# Altium PCB PCB1.PcbDoc
Units mil, origin at the board's own origin, x right, y up, seen from the top; angles counter-clockwise.
Board outline 4530 x 1050 mil, 2 copper layers (Top Layer, Bottom Layer); 38 components, 23 nets, 97 pads, 0 vias.
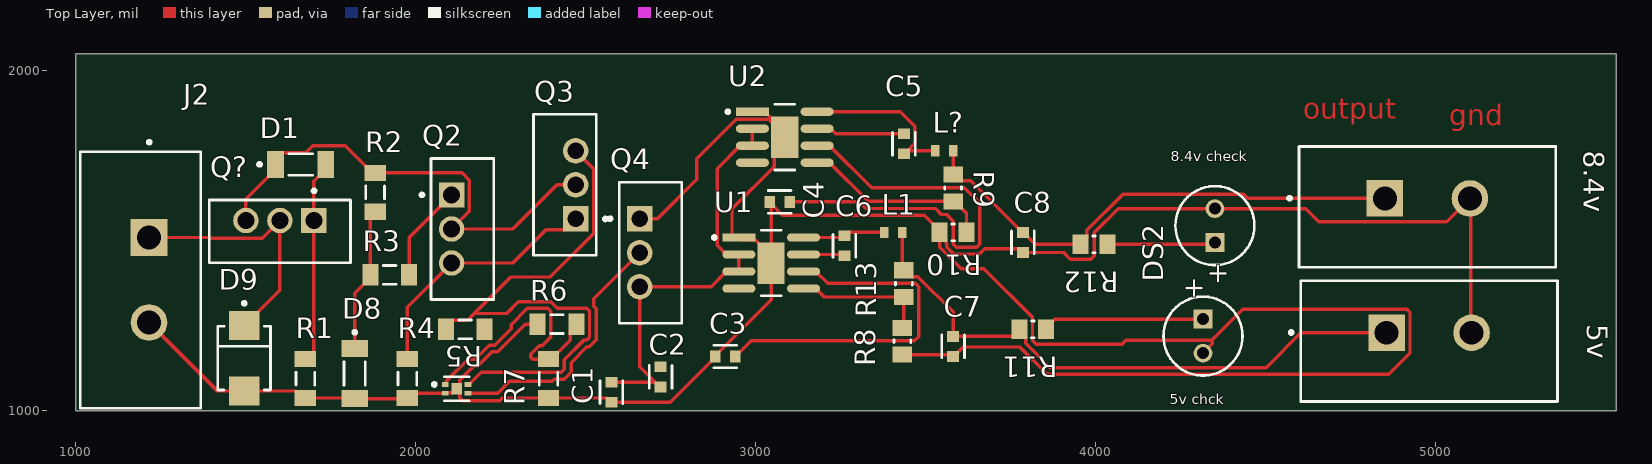
[diagram p0: Top Layer view]
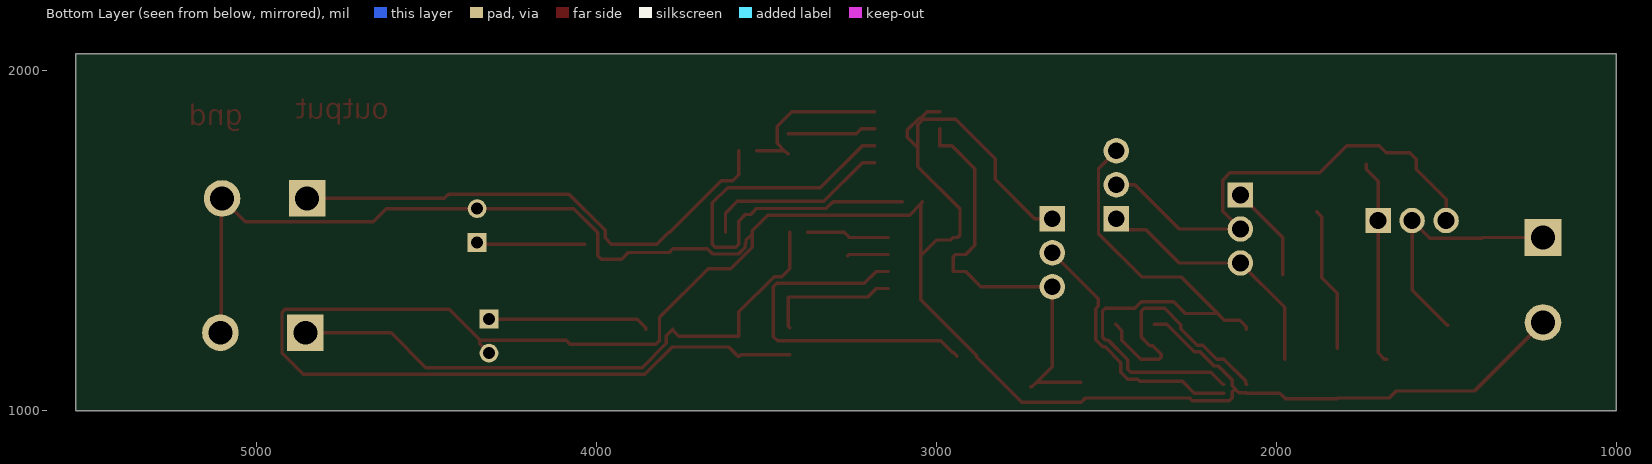
[diagram p1: Bottom Layer view, seen from below]
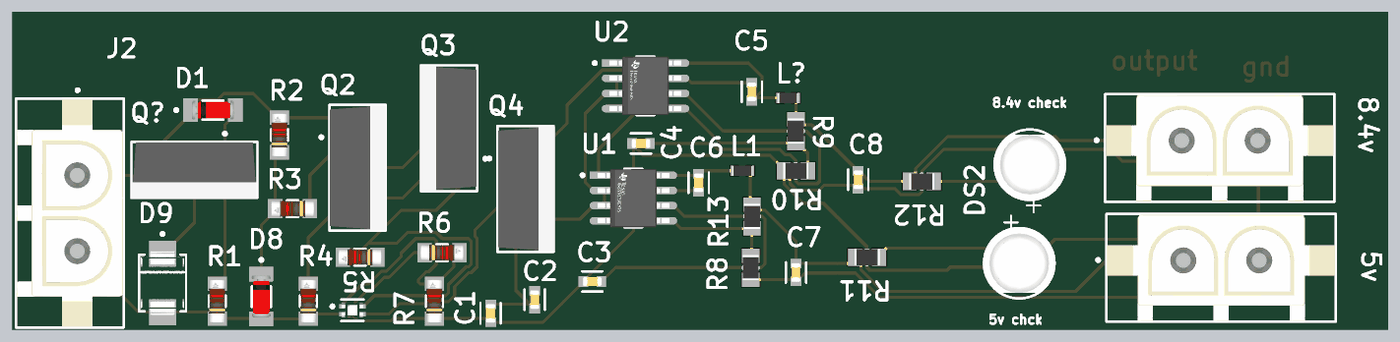
[diagram p2: 3D render of the assembled board from above, using the file's embedded part models]

## Layer stack, top to bottom
Top Solder: solder mask 0.4, Solder Resist, Dk 3.5
Top Layer: signal copper 1.4
Dielectric 1: dielectric 12.6, FR-4, Dk 4.8
Bottom Layer: signal copper 1.4
Bottom Solder: solder mask 0.4, Solder Resist, Dk 3.5

## Board outline
1000,1000 5530,1000 5530,2050 1000,2050

## Design rules (kind name [scope] priority, off if disabled: settings)
Clearance [All] p1: gap=10 ignorepadtopadclearanceinfootprint=FALSE
PolygonConnect [All] p1: connectstyle=Relief reliefconductorwidth=10 reliefentries=4 polygonreliefangle="90 Angle" airgapwidth=10
RoutingVias [All] p1: holewidth=28 width=50 viastyle="Through Hole" minholewidth=28 minwidth=50 maxholewidth=28 maxwidth=50
SolderMaskExpansion [All] p1: expansion=4 istentingtop=FALSE
SupplyNets "Schematic Supply Nets_3" [InNet('GND')] p1: voltage=0.000
SupplyNets "Schematic Supply Nets_2" [InNet('+12')] p2: voltage=0.000
SupplyNets "Schematic Supply Nets_1" [InNet('+8.4')] p3: voltage=0.000
SupplyNets "Schematic Supply Nets" [InNet('+5')] p4: voltage=0.000
Width [All] p1: maxlimit=10 minlimit=10 preferedwidth=10
30 further rules are at their usual default settings.

## Classes and differential pairs
component class Sheet1: 1 "12v inp" C1 C2 C3 C4 C5 C6 C7 C8 D1 D8 D9 DS2 J2 L1 L? Q2 Q3 Q4 Q? R1 R2 R3 R4 R5 R6 R7 R8 R9 R10 R11 R12 R13 U1 U2

## Components (designator, comment, footprint, x,y, rotation, side; value= is the part's Value field where it differs from the comment)
5v "350428-1" FP-350428-1-MFG 4980,1205 r0 top (schematic designator J1)
"5v chck" "WP7113SGC" KING-WP7113SGC_V 4315,1220 r270 top (schematic designator DS?)
8.4v "350428-1" FP-350428-1-MFG 4975,1600 r0 top (schematic designator J3)
C1 "CC0603KRX7R9BB103" FP-CC0603-DA-MFG 2575,1055 r270 top value="10 nF"
C2 "CC0603KRX7R9BB103" FP-CC0603-DA-MFG 2720,1100 r90 top value=0.1µF
C3 "CC0603KRX7R9BB103" FP-CC0603-DA-MFG 2910,1160 r0 top value=0.1µF
C4 "CC0603KRX7R9BB103" FP-CC0603-DA-MFG 3070,1615 r0 top value=1µF
C5 "CC0603KRX7R9BB103" FP-CC0603-DA-MFG 3435,1785.47 r270 top value=0.1µF
C6 "CC0603KRX7R9BB103" FP-CC0603-DA-MFG 3260,1485.47 r90 top value=0.1µF
C7 "CC0603KRX7R9BB103" FP-CC0603-DA-MFG 3580,1189.53 r270 top value=1.5µF
C8 "CC0603KRX7R9BB103" FP-CC0603-DA-MFG 3785,1495.47 r270 top value=0.39µF
D1 "TZMC10GS08" FP-6_560-5005_01-4-MFG 1661.18,1725 r0 top
D8 "TZMC10GS08" FP-6_560-5005_01-4-MFG 1820,1110 r270 top
D9 "SMBJ28A" FP-SMBJ-MFG 1495,1155 r270 top
DS2 "WP7113SGC" KING-WP7113SGC_V 4350,1545 r90 top
J2 "350428-1" FP-350428-1-MFG 1190,1385 r270 top
L1 "B82496C3330J" INDC1608X90X30LL10T20 3404.02,1525 r0 top
L? "B82496C3330J" INDC1608X90X30LL10T20 3554.02,1765 r0 top
Q2 "IRF5305PBF" FP-PG-TO220-3-0 2136.89,1535 r0 top
Q3 "IRF5305PBF" FP-PG-TO220-3-0 2438.11,1665 r180 top
Q4 "IRF5305PBF" FP-PG-TO220-3-0 2690,1465 r0 top
Q? "IRF5305PBF" FP-PG-TO220-3-0 1600,1528.11 r270 top
R1 "CMA02040X1000GB300" FP-CMA0204-MFG 1675,1095 r90 top
R2 "CMA02040X1000GB300" FP-CMA0204-MFG 1880,1642.91 r90 top
R3 "CMA02040X1000GB300" FP-CMA0204-MFG 1922.91,1400 r180 top
R4 "CMA02040X1000GB300" FP-CMA0204-MFG 1975,1095 r90 top
R5 "CMA02040X1000GB300" FP-CMA0204-MFG 2145,1240 r180 top
R6 "CMA02040X1000GB300" FP-CMA0204-MFG 2415,1255 r0 top
R7 "CMA02040X1000GB300" FP-CMA0204-MFG 2390,1095 r90 top
R8 "RC0805JR-070RL" RESC2013X60X35ML10T20 3430.98,1205 r90 top
R9 "RC0805JR-070RL" RESC2013X60X35ML10T20 3580,1655.63 r90 top
R10 "RC0805JR-070RL" RESC2013X60X35ML10T20 3580,1525 r0 top
R11 "RC0805JR-070RL" RESC2013X60X35ML10T20 3814.37,1240 r180 top
R12 "RC0805JR-070RL" RESC2013X60X35ML10T20 3994.37,1490 r180 top
R13 "RC0805JR-070RL" RESC2013X60X35ML10T20 3435,1374.37 r90 top (schematic designator R7)
U1 "LMR36510ADDAR" FP-DDA0008E-IPC_A 3044.88,1435 r0 top
U2 "LMR36510ADDAR" FP-DDA0008E-IPC_A 3084.88,1805 r0 top
? "ZXCT1023DFGTA" FP-TDFN1218-4-MFG 2120,1065 r0 top

## Footprints (in the part's own frame and the unit in brackets; to place one, negate y for a bottom-side part, rotate by r counter-clockwise, add the part's x,y. Pads: shape width x height; smd on the part's side, far side on the other; paste and mask are expansions set on the pad)
FP-6_560-5005_01-4-MFG [mm]
  rect 1.25x2 smd paste+0 mask+0: 1(-1.875,0) 2(1.875,0)
  silkscreen extent -3.2,-0.8 0.87,0.8, body extent -2.6,-1.1 2.6,1.1, height 0.25
FP-350428-1-MFG [mm]
  rect 2.73x2.73 hole 1.78 paste-2539.97 mask+0: 1(-3.175,0.635)
  round 2.73 hole 1.78 paste-2539.97 mask+0: 2(3.175,0.635)
  silkscreen extent -10.42,-4.51 9.59,4.51, body extent -9.69,-4.61 9.69,4.61, height 0.25
FP-CC0603-DA-MFG [mm]
  rect 0.8x0.9 smd paste+0 mask+0: 1(-0.75,0) 2(0.75,0)
  silkscreen extent -0.85,-0.85 0.85,0.85, body extent -1.35,-0.75 1.35,0.75, height 0.25
FP-CMA0204-MFG [mm]
  rect 1.2x1.6 smd paste+0 mask+0: 1(-1.45,0) 2(1.45,0)
  silkscreen extent -0.48,-0.7 0.48,0.7, body extent -2.15,-0.9 2.15,0.9, height 0.25
FP-DDA0008E-IPC_A [mm]
  rect 2.474x0.622 smd paste+0 mask+0: 1(-2.416,1.905)
  rrect100% 2.474x0.622 smd paste+0 mask+0: 2(-2.416,0.635) 3(-2.416,-0.635) 4(-2.416,-1.905) 5(2.416,-1.905) 6(2.416,-0.635) 7(2.416,0.635) 8(2.416,1.905)
  rect 2.025x3.1 smd paste-1000 mask+0: 9(0,0)
  silkscreen extent -4.37,-2.45 0.75,2.45, body extent -4.15,-2.95 4.15,2.95, height 0.25
FP-PG-TO220-3-0 [mm]
  rect 1.9x1.9 hole 1.25 paste-2539.97 mask+0: 1(-0.81,2.54)
  round 1.9 hole 1.25 paste-2539.97 mask+0: 2(-0.81,0) 3(-0.81,-2.54)
  silkscreen extent -3.15,-5.27 2.34,5.27, body extent -2.44,-5.37 2.44,5.37, height 0.25
FP-SMBJ-MFG [mm]
  rect 2.16x2.26 smd paste+0 mask+0: 1(-2.45,0) 2(2.45,0)
  silkscreen extent -4.22,-1.97 2.37,1.97, body extent -3.63,-2.07 3.63,2.07, height 0.25
FP-TDFN1218-4-MFG [mm]
  rect 0.5x0.35 smd paste+0 mask+0: 1(-0.85,0.325) 2(-0.85,-0.325) 3(0.85,-0.325) 4(0.85,0.325)
  rect 0.8x0.85 smd paste+0 mask+0: 5(0,0)
  silkscreen extent -1.8,-0.9 0.92,0.9, body extent -1.2,-0.72 1.2,0.72, height 0.25
INDC1608X90X30LL10T20 [mm] "Chip Inductor, 2-Leads, Body 1.7x0.9mm, IPC High Density"
  rect 0.64x0.84 smd: 1(-0.66,0) 2(0.66,0)
  body extent -0.85,-0.45 0.85,0.45, height 0.9
KING-WP7113SGC_V [mm] "THD, 2-Leads, Dia 5.9mm, Body Length 8.6mm"
  rect 1.4x1.4 hole 0.889: 1(-1.27,0)
  round 1.4 hole 0.889: 2(1.27,0)
  silkscreen extent -2.95,-2.95 2.95,2.95, body extent -2.95,-2.95 2.5,2.95, height 15.5
RESC2013X60X35ML10T20 [mm] "Chip Resistor, 2-Leads, Body 2.1x1.35mm, IPC Low Density"
  rect 1.2x1.45 smd: 1(-1,0) 2(1,0)
  silkscreen extent -0.1,-0.63 0.1,0.63, body extent -1.05,-0.68 1.05,0.67, height 0.6

## Part data
5v 8.4v J2: library part CMP-03369-000080-1, "CONN HEADER VERT 2POS 6.35MM", Current Rating=12A, Manufacturer="TE Connectivity", Temperature="-40°C to +105°C", Temperature Range High=+105°C, Temperature Range Low=-40°C, Voltage Rating=600V, Automotive=No, Category=Conn, ComponentLink2Description=Datasheet, ComponentLink2URL=https://www.te.com/commerce/DocumentDelivery/DDEController?Action=showdoc&DocId=Customer+Drawing%7F350428%7FY2%7Fpdf%7FEnglish%7FENG_CD_350428_Y2.pdf%7F350428-1, Conn Gender=Male, Conn Orientation=Vertical, Contact Material=Gold,Nickel, Device Class L1=Connectors, Device Class L2="Headers and Wire Housings", Device Class L3=unset, Digikey Description="CONN HEADER VERT 2POS 6.35MM", Height=14.99mm, Lead Free=Yes, Manufacturer Part Number=350428-1, Mouser Description="Connector, Soft Shell; Universal MATE-N-LOK; 2; Nylon; Natural; 19 A; 600 VAC", Number Of Contacts=2, Number Of Rows=1, Octopart=https://octopart.com/350428-1-te+connectivity-46505355, Package=350428-1, Pitch=6.35mm, RoHS=TRUE, Standoff Height=0.63mm
"5v chck" DS2: library part CMP-1757-00001-1, "The Super Bright Green Source Color Device, 2.2 V, -40 to 85 degC, 2-Pin THD, RoHS, Tape and Reel", Case Code (Imperial)=0603, Case Code (Metric)=1608, Colour=Yellow, Forward Current="20 mA", Forward Voltage="2.1 V", Max Operating Temperature="85 degC", Min Operating Temperature="-40 degC", Package Quantity=4000, Power Rating="52 mW", Case\Package=0603, ComponentLink1Description=Datasheet, ComponentLink1URL=http://www.kingbrightusa.com/images/catalog/SPEC/WP7113SGC.pdf, DatasheetVersion="Rev. 9B, 01/2015", Height="0.8 mm", Illumination Colour=Yellow, Length="1.6 mm", Lens Style=Diffused, Luminous Intensity="8 mcd", Mount="Surface Mount", Nominal Vf="2.1 V", Nominal Wavelength="586 nm", PackageDescription="2-Pin Through Hole Device, Dia 5.9 mm, Body Length 8.6 mm", PackageReference=WP7113SGC, Packaging="Tape and Reel", Pins=2, Radiation Hardening=No, RoHSCompliant=true, Viewing Angle="170 degrees", Width="0.8 mm"
C1: library part CMP-2100-03600-2, "CAP CER 10000PF 50V X7R 0603", Capacitance=4.7µF, Manufacturer=YAGEO, Package=CC0603-DA, Temperature="-55°C to +125°C", Temperature Characteristic=X7R, Temperature Coefficient=15%, Temperature Range High=+125°C, Temperature Range Low=-55°C, Tolerance=0.1, Voltage="50 V", Automotive=No, Category=Cap, ComponentLink2Description=Datasheet, ComponentLink2URL=http://www.yageo.com/documents/recent/UPY-GPHC_X7R_6.3V-to-50V_18.pdf, Device Class L1="Passive Components", Device Class L2=Capacitors, Device Class L3="Ceramic Capacitors", Digikey Description="CAP CER 10000PF 50V X7R 0603", Footprint Url=http://www.yageo.com/exep/pages/download/literatures/UPY-C_GEN_24.pdf, Height=0.9mm, Lead Free=Yes, Manufacturer Part Number=CC0603KRX7R9BB103, Material=Ceramic, Mouser Description="Multilayer Ceramic Capacitor, CC Series, 0.01 - F, - 10%, X7R, 50 V, 0603 [1608 Metric]", Octopart=https://octopart.com/cc0603krx7r9bb103-yageo-192938, RoHS=TRUE, Voltage Rating="50 V"
C2 C5 C6: library part CMP-2100-03600-2, "CAP CER 10000PF 50V X7R 0603", Capacitance=0.1µF, Manufacturer=YAGEO, Package=CC0603-DA, Temperature="-55°C to +125°C", Temperature Characteristic=X7R, Temperature Coefficient=15%, Temperature Range High=+125°C, Temperature Range Low=-55°C, Tolerance=0.1, Voltage="50 V", Automotive=No, Category=Cap, ComponentLink2Description=Datasheet, ComponentLink2URL=http://www.yageo.com/documents/recent/UPY-GPHC_X7R_6.3V-to-50V_18.pdf, Device Class L1="Passive Components", Device Class L2=Capacitors, Device Class L3="Ceramic Capacitors", Digikey Description="CAP CER 10000PF 50V X7R 0603", Footprint Url=http://www.yageo.com/exep/pages/download/literatures/UPY-C_GEN_24.pdf, Height=0.9mm, Lead Free=Yes, Manufacturer Part Number=CC0603KRX7R9BB103, Material=Ceramic, Mouser Description="Multilayer Ceramic Capacitor, CC Series, 0.01 - F, - 10%, X7R, 50 V, 0603 [1608 Metric]", Octopart=https://octopart.com/cc0603krx7r9bb103-yageo-192938, RoHS=TRUE, Voltage Rating="50 V"
C3 C4: library part CMP-2100-03600-2, "CAP CER 10000PF 50V X7R 0603", Capacitance=1µF, Manufacturer=YAGEO, Package=CC0603-DA, Temperature="-55°C to +125°C", Temperature Characteristic=X7R, Temperature Coefficient=15%, Temperature Range High=+125°C, Temperature Range Low=-55°C, Tolerance=0.1, Voltage="50 V", Automotive=No, Category=Cap, ComponentLink2Description=Datasheet, ComponentLink2URL=http://www.yageo.com/documents/recent/UPY-GPHC_X7R_6.3V-to-50V_18.pdf, Device Class L1="Passive Components", Device Class L2=Capacitors, Device Class L3="Ceramic Capacitors", Digikey Description="CAP CER 10000PF 50V X7R 0603", Footprint Url=http://www.yageo.com/exep/pages/download/literatures/UPY-C_GEN_24.pdf, Height=0.9mm, Lead Free=Yes, Manufacturer Part Number=CC0603KRX7R9BB103, Material=Ceramic, Mouser Description="Multilayer Ceramic Capacitor, CC Series, 0.01 - F, - 10%, X7R, 50 V, 0603 [1608 Metric]", Octopart=https://octopart.com/cc0603krx7r9bb103-yageo-192938, RoHS=TRUE, Voltage Rating="50 V"
C7: library part CMP-2100-03600-2, "CAP CER 10000PF 50V X7R 0603", Capacitance=1.5µF, Manufacturer=YAGEO, Package=CC0603-DA, Temperature="-55°C to +125°C", Temperature Characteristic=X7R, Temperature Coefficient=15%, Temperature Range High=+125°C, Temperature Range Low=-55°C, Tolerance=0.1, Voltage="50 V", Automotive=No, Category=Cap, ComponentLink2Description=Datasheet, ComponentLink2URL=http://www.yageo.com/documents/recent/UPY-GPHC_X7R_6.3V-to-50V_18.pdf, Device Class L1="Passive Components", Device Class L2=Capacitors, Device Class L3="Ceramic Capacitors", Digikey Description="CAP CER 10000PF 50V X7R 0603", Footprint Url=http://www.yageo.com/exep/pages/download/literatures/UPY-C_GEN_24.pdf, Height=0.9mm, Lead Free=Yes, Manufacturer Part Number=CC0603KRX7R9BB103, Material=Ceramic, Mouser Description="Multilayer Ceramic Capacitor, CC Series, 0.01 - F, - 10%, X7R, 50 V, 0603 [1608 Metric]", Octopart=https://octopart.com/cc0603krx7r9bb103-yageo-192938, RoHS=TRUE, Voltage Rating="50 V"
C8: library part CMP-2100-03600-2, "CAP CER 10000PF 50V X7R 0603", Capacitance=0.39µF, Manufacturer=YAGEO, Package=CC0603-DA, Temperature="-55°C to +125°C", Temperature Characteristic=X7R, Temperature Coefficient=15%, Temperature Range High=+125°C, Temperature Range Low=-55°C, Tolerance=0.1, Voltage="50 V", Automotive=No, Category=Cap, ComponentLink2Description=Datasheet, ComponentLink2URL=http://www.yageo.com/documents/recent/UPY-GPHC_X7R_6.3V-to-50V_18.pdf, Device Class L1="Passive Components", Device Class L2=Capacitors, Device Class L3="Ceramic Capacitors", Digikey Description="CAP CER 10000PF 50V X7R 0603", Footprint Url=http://www.yageo.com/exep/pages/download/literatures/UPY-C_GEN_24.pdf, Height=0.9mm, Lead Free=Yes, Manufacturer Part Number=CC0603KRX7R9BB103, Material=Ceramic, Mouser Description="Multilayer Ceramic Capacitor, CC Series, 0.01 - F, - 10%, X7R, 50 V, 0603 [1608 Metric]", Octopart=https://octopart.com/cc0603krx7r9bb103-yageo-192938, RoHS=TRUE, Voltage Rating="50 V"
D1 D8: library part CMP-00030-07941520-1, "TZMC10GS08 Diode Zener Single 10 Volt 5% 500mW 2-Pin Quadro MELF SOD-80 Tape and Reel", Current=1A, Forward Voltage=1.5V, Max Operating Temperature=175°C, Max Power Dissipation=500mW, Max Reverse Leakage Current=100nA, Min Operating Temperature=-65°C, Peak Reverse Current=100mA, Test Current=5mA, Tolerance=5%, Voltage=10V, Element Configuration=Single, Height=1.6mm, Impedance=15Ω, Lead Free="Lead Free", Length=3.7mm, Mount="Surface Mount", NexarPartId=7941520, Number of Pins=2, Power Dissipation=500mW, Radiation Hardening=No, RoHS=Compliant, Schedule B="8541100050, 8541100050", Voltage Tolerance=5%, Width=1.6mm, Working Voltage=10V, Zener Voltage=10V
D9: library part CMP-08607-000081-1, "TVS DIODE 28V 45.4V DO214AA", Breakdown Voltage=31.1V, Clamping Voltage=45.4V, Manufacturer="Littelfuse Inc", Max Junction Temp=+150°C, Package=SMBJ, Peak Pulse Current=13.3A, Peak Pulse Power=600W, Reverse Standoff Voltage=28V, Temperature="-65°C to +150°C", Temperature Range Low=-65°C, Automotive=No, Category=Diode, ComponentLink2Description=Datasheet, ComponentLink2URL=https://www.littelfuse.com/~/media/electronics/datasheets/tvs_diodes/littelfuse_tvs_diode_smbj_datasheet.pdf.pdf, Device Class L1="Circuit Protection", Device Class L2="TVS Diodes", Device Class L3=unset, Digikey Description="TVS DIODE 28V 45.4V DO214AA", Direction=Unidirectional, Height=2.61mm, Lead Free=Yes, Manufacturer Part Number=SMBJ28A, Mouser Description="Littelfuse SMBJ28A, Uni-Directional TVS Diode, 600W, 2-Pin DO-214AA", Number Of Channels=1, Octopart=https://octopart.com/smbj28a-littelfuse-350790, RoHS=TRUE, Temperature Range High=+150°C
L1: library part CMP-2000-05913-1, "Unshielded Wirewound Inductor, 33 nH, 350 mA, -55 to 150 degC, 0603 (1608 Metric), RoHS, Tape and Reel", Current - Saturation=-, Current Rating=350mA, DC Resistance (DCR)=600mOhmMax, Frequency - Self Resonant=3GHz, Frequency - Test=100MHz, Inductance=22µH, Manufacturer=EPCOS-(TDK), Package / Case=0603(1608Metric), Package Description="2-Pin Surface Mount Device, Body 1.6 x 0.8 mm", Package Reference=0603, Q @ Freq=14@100MHz, Ratings=AEC-Q200, Tolerance=±5%, Category=Inductors,Coils,Chokes, Datasheet URL=https://en.tdk.eu/inf/30/db/ind_2008/b82496c.pdf, Datasheet Version=07/2016, Family=FixedInductors, Height - Seated (Max)="0.035\"(0.90mm)", Manufacturer URL=http://www.tdk.com/, Material - Core=Ceramic, Mounting Technology=SurfaceMount, Mounting Type=SurfaceMount, Operating Temperature=-, Packaging=CutTape(CT), Series=SIMID, Shielding=Unshielded, Size / Dimension="0.063\"Lx0.031\"W(1.60mmx0.80mm)", Type=Wirewound
L?: library part CMP-2000-05913-1, "Unshielded Wirewound Inductor, 33 nH, 350 mA, -55 to 150 degC, 0603 (1608 Metric), RoHS, Tape and Reel", Current - Saturation=-, Current Rating=350mA, DC Resistance (DCR)=600mOhmMax, Frequency - Self Resonant=3GHz, Frequency - Test=100MHz, Inductance=20µH, Manufacturer=EPCOS-(TDK), Package / Case=0603(1608Metric), Package Description="2-Pin Surface Mount Device, Body 1.6 x 0.8 mm", Package Reference=0603, Q @ Freq=14@100MHz, Ratings=AEC-Q200, Tolerance=±5%, Category=Inductors,Coils,Chokes, Datasheet URL=https://en.tdk.eu/inf/30/db/ind_2008/b82496c.pdf, Datasheet Version=07/2016, Family=FixedInductors, Height - Seated (Max)="0.035\"(0.90mm)", Manufacturer URL=http://www.tdk.com/, Material - Core=Ceramic, Mounting Technology=SurfaceMount, Mounting Type=SurfaceMount, Operating Temperature=-, Packaging=CutTape(CT), Series=SIMID, Shielding=Unshielded, Size / Dimension="0.063\"Lx0.031\"W(1.60mmx0.80mm)", Type=Wirewound
Q2 Q3 Q4 Q?: library part CMP-32901-000003-1, "MOSFET P-CH 55V 31A TO-220AB", Continuous Drain Current=-31A, Drain To Source Breakdown Voltage=-55V, Drain To Source Resistance=0.06Ω, Gate To Source Voltage=20V, Input Capacitace At Vds="1200pF @ -25V", Manufacturer=Infineon, Max Forward Diode Voltage=-1.3V, Max Junction Temp=+175°C, Package=PG-TO220-3, Power Dissipation=110W, Pulse Drain Current=-110A, Temperature="-55°C to +175°C", Temperature Range Low=-55°C, Automotive=No, Category=Trans, ComponentLink2Description=Datasheet, ComponentLink2URL=https://www.infineon.com/dgdl/irf5305pbf.pdf?fileId=5546d462533600a4015355e370101993, Depletion Mode=False, Device Class L1="Discrete Semiconductors", Device Class L2=Transistors, Device Class L3=MOSFETs, Digikey Description="MOSFET P-CH 55V 31A TO-220AB", Drain To Source Voltage=-55V, Gate Charge At Vgs="63nC @ -10V", Height=19.3mm, Lead Free=Yes, Manufacturer Part Number=IRF5305PBF, Number Of Channels=1, Number Of P Channels=1, Octopart=https://octopart.com/irf5305pbf-infineon-65873396, Reverse Recovery Charge=170nC, Reverse Recovery Time=71ns, RoHS=TRUE, Rthja Max=62°C/W, Standoff Height=3.55mm, Temperature Range High=+175°C, Threshold Vgs Max=-4V, Threshold Vgs Min=-2V, Turn Off Delay Time=39ns, Turn On Delay Time=14ns
R1 R3: library part CMP-00030-42810921-1, "CMA02040X1000GB300 Surface Mount MELF Resistor, 100 Ohm, ± 2%, 250 mW, 0204 [3715 Metric], Carbon Film", Case/Package=0204, Max Operating Temperature=125°C, Max Power Dissipation=400mW, Min Operating Temperature=-55°C, Operating Supply Voltage=200V, Resistance=100kΩ, Temperature Coefficient=-250ppm/°C, Tolerance=2%, Composition="Carbon Film", Contact Plating=Tin, Diameter=1.4mm, Lead Free="Lead Free", Length=3.6mm, Military Standard=Not, Mount="Surface Mount", NexarPartId=42810921, Number of Pins=2, Number of Terminations=2, Packaging=Digi-Reel®, Power Rating=400mW, Radiation Hardening=No, REACH SVHC=Unknown, RoHS=Compliant, Schedule B="8533100042, 8533100042", Termination=Wraparound, Voltage Rating=200V, Voltage Rating (DC)=200V, Weight=18.99418mg, Width=3.6mm
R2: library part CMP-00030-42810921-1, "CMA02040X1000GB300 Surface Mount MELF Resistor, 100 Ohm, ± 2%, 250 mW, 0204 [3715 Metric], Carbon Film", Case/Package=0204, Max Operating Temperature=125°C, Max Power Dissipation=400mW, Min Operating Temperature=-55°C, Operating Supply Voltage=200V, Resistance=2.7kΩ, Temperature Coefficient=-250ppm/°C, Tolerance=2%, Composition="Carbon Film", Contact Plating=Tin, Diameter=1.4mm, Lead Free="Lead Free", Length=3.6mm, Military Standard=Not, Mount="Surface Mount", NexarPartId=42810921, Number of Pins=2, Number of Terminations=2, Packaging=Digi-Reel®, Power Rating=400mW, Radiation Hardening=No, REACH SVHC=Unknown, RoHS=Compliant, Schedule B="8533100042, 8533100042", Termination=Wraparound, Voltage Rating=200V, Voltage Rating (DC)=200V, Weight=18.99418mg, Width=3.6mm
R4: library part CMP-00030-42810921-1, "CMA02040X1000GB300 Surface Mount MELF Resistor, 100 Ohm, ± 2%, 250 mW, 0204 [3715 Metric], Carbon Film", Case/Package=0204, Max Operating Temperature=125°C, Max Power Dissipation=400mW, Min Operating Temperature=-55°C, Operating Supply Voltage=200V, Resistance=6.8kΩ, Temperature Coefficient=-250ppm/°C, Tolerance=2%, Composition="Carbon Film", Contact Plating=Tin, Diameter=1.4mm, Lead Free="Lead Free", Length=3.6mm, Military Standard=Not, Mount="Surface Mount", NexarPartId=42810921, Number of Pins=2, Number of Terminations=2, Packaging=Digi-Reel®, Power Rating=400mW, Radiation Hardening=No, REACH SVHC=Unknown, RoHS=Compliant, Schedule B="8533100042, 8533100042", Termination=Wraparound, Voltage Rating=200V, Voltage Rating (DC)=200V, Weight=18.99418mg, Width=3.6mm
R5: library part CMP-00030-42810921-1, "CMA02040X1000GB300 Surface Mount MELF Resistor, 100 Ohm, ± 2%, 250 mW, 0204 [3715 Metric], Carbon Film", Case/Package=0204, Max Operating Temperature=125°C, Max Power Dissipation=400mW, Min Operating Temperature=-55°C, Operating Supply Voltage=200V, Resistance=20mΩ, Temperature Coefficient=-250ppm/°C, Tolerance=2%, Composition="Carbon Film", Contact Plating=Tin, Diameter=1.4mm, Lead Free="Lead Free", Length=3.6mm, Military Standard=Not, Mount="Surface Mount", NexarPartId=42810921, Number of Pins=2, Number of Terminations=2, Packaging=Digi-Reel®, Power Rating=400mW, Radiation Hardening=No, REACH SVHC=Unknown, RoHS=Compliant, Schedule B="8533100042, 8533100042", Termination=Wraparound, Voltage Rating=200V, Voltage Rating (DC)=200V, Weight=18.99418mg, Width=3.6mm
R6: library part CMP-00030-42810921-1, "CMA02040X1000GB300 Surface Mount MELF Resistor, 100 Ohm, ± 2%, 250 mW, 0204 [3715 Metric], Carbon Film", Case/Package=0204, Max Operating Temperature=125°C, Max Power Dissipation=400mW, Min Operating Temperature=-55°C, Operating Supply Voltage=200V, Resistance=2kΩ, Temperature Coefficient=-250ppm/°C, Tolerance=2%, Composition="Carbon Film", Contact Plating=Tin, Diameter=1.4mm, Lead Free="Lead Free", Length=3.6mm, Military Standard=Not, Mount="Surface Mount", NexarPartId=42810921, Number of Pins=2, Number of Terminations=2, Packaging=Digi-Reel®, Power Rating=400mW, Radiation Hardening=No, REACH SVHC=Unknown, RoHS=Compliant, Schedule B="8533100042, 8533100042", Termination=Wraparound, Voltage Rating=200V, Voltage Rating (DC)=200V, Weight=18.99418mg, Width=3.6mm
R7: library part CMP-00030-42810921-1, "CMA02040X1000GB300 Surface Mount MELF Resistor, 100 Ohm, ± 2%, 250 mW, 0204 [3715 Metric], Carbon Film", Case/Package=0204, Max Operating Temperature=125°C, Max Power Dissipation=400mW, Min Operating Temperature=-55°C, Operating Supply Voltage=200V, Resistance=6kΩ, Temperature Coefficient=-250ppm/°C, Tolerance=2%, Composition="Carbon Film", Contact Plating=Tin, Diameter=1.4mm, Lead Free="Lead Free", Length=3.6mm, Military Standard=Not, Mount="Surface Mount", NexarPartId=42810921, Number of Pins=2, Number of Terminations=2, Packaging=Digi-Reel®, Power Rating=400mW, Radiation Hardening=No, REACH SVHC=Unknown, RoHS=Compliant, Schedule B="8533100042, 8533100042", Termination=Wraparound, Voltage Rating=200V, Voltage Rating (DC)=200V, Weight=18.99418mg, Width=3.6mm
R8 R9: library part CMP-2100-03673-1, "Chip Resistor, 0 Ohm, Jumper, +/- 5%, 0.125 W, -55 to 155 degC, 0805 (2012 Metric), RoHS, Tape and Reel", Case Code (Imperial)=0805, Case Code (Metric)=2012, Manufacturer=Yageo, Max Operating Temperature=155degC, Min Operating Temperature=-55degC, Package Description="2-Pin Surface Mounted Device, Body 2 x 1.25 mm", Power Rating=125mW, Resistance=24.9kOhm, Temperature Coefficient=200ppm/degreesC, Tolerance=5%, Voltage Rating=150V, Case/Package=0805, Composition=ThickFilm, Contact Plating=Tin, Datasheet URL=http://www.yageo.com/NewPortal/yageodocoutput?fileName=/pdf/R-Chip/PYu-RC_Group_51_RoHS_L_5.pdf, Datasheet Version="Rev. 5, 10/2016", Depth=1.25mm, Height=0.5mm, Lead Free=LeadFree, Length=2mm, Manufacturer URL=http://www.yageo.com/, Military Standard=Not, Number of Pins=2, Package Reference=0805, Packaging=TapeandReel, Radiation Hardening=No, REACH SVHC=Unknown, RoHSCompliant=true, Termination=SMD/SMT, Voltage Rating (DC)=150V, Width=1.25mm
R10: library part CMP-2100-03673-1, "Chip Resistor, 0 Ohm, Jumper, +/- 5%, 0.125 W, -55 to 155 degC, 0805 (2012 Metric), RoHS, Tape and Reel", Case Code (Imperial)=0805, Case Code (Metric)=2012, Manufacturer=Yageo, Max Operating Temperature=155degC, Min Operating Temperature=-55degC, Package Description="2-Pin Surface Mounted Device, Body 2 x 1.25 mm", Power Rating=125mW, Resistance=2.7kOhm, Temperature Coefficient=200ppm/degreesC, Tolerance=5%, Voltage Rating=150V, Case/Package=0805, Composition=ThickFilm, Contact Plating=Tin, Datasheet URL=http://www.yageo.com/NewPortal/yageodocoutput?fileName=/pdf/R-Chip/PYu-RC_Group_51_RoHS_L_5.pdf, Datasheet Version="Rev. 5, 10/2016", Depth=1.25mm, Height=0.5mm, Lead Free=LeadFree, Length=2mm, Manufacturer URL=http://www.yageo.com/, Military Standard=Not, Number of Pins=2, Package Reference=0805, Packaging=TapeandReel, Radiation Hardening=No, REACH SVHC=Unknown, RoHSCompliant=true, Termination=SMD/SMT, Voltage Rating (DC)=150V, Width=1.25mm
R11: library part CMP-2100-03673-1, "Chip Resistor, 0 Ohm, Jumper, +/- 5%, 0.125 W, -55 to 155 degC, 0805 (2012 Metric), RoHS, Tape and Reel", Case Code (Imperial)=0805, Case Code (Metric)=2012, Manufacturer=Yageo, Max Operating Temperature=155degC, Min Operating Temperature=-55degC, Package Description="2-Pin Surface Mounted Device, Body 2 x 1.25 mm", Power Rating=125mW, Resistance=166.66666Ohm, Temperature Coefficient=200ppm/degreesC, Tolerance=5%, Voltage Rating=150V, Case/Package=0805, Composition=ThickFilm, Contact Plating=Tin, Datasheet URL=http://www.yageo.com/NewPortal/yageodocoutput?fileName=/pdf/R-Chip/PYu-RC_Group_51_RoHS_L_5.pdf, Datasheet Version="Rev. 5, 10/2016", Depth=1.25mm, Height=0.5mm, Lead Free=LeadFree, Length=2mm, Manufacturer URL=http://www.yageo.com/, Military Standard=Not, Number of Pins=2, Package Reference=0805, Packaging=TapeandReel, Radiation Hardening=No, REACH SVHC=Unknown, RoHSCompliant=true, Termination=SMD/SMT, Voltage Rating (DC)=150V, Width=1.25mm
R12: library part CMP-2100-03673-1, "Chip Resistor, 0 Ohm, Jumper, +/- 5%, 0.125 W, -55 to 155 degC, 0805 (2012 Metric), RoHS, Tape and Reel", Case Code (Imperial)=0805, Case Code (Metric)=2012, Manufacturer=Yageo, Max Operating Temperature=155degC, Min Operating Temperature=-55degC, Package Description="2-Pin Surface Mounted Device, Body 2 x 1.25 mm", Power Rating=125mW, Resistance=280Ohm, Temperature Coefficient=200ppm/degreesC, Tolerance=5%, Voltage Rating=150V, Case/Package=0805, Composition=ThickFilm, Contact Plating=Tin, Datasheet URL=http://www.yageo.com/NewPortal/yageodocoutput?fileName=/pdf/R-Chip/PYu-RC_Group_51_RoHS_L_5.pdf, Datasheet Version="Rev. 5, 10/2016", Depth=1.25mm, Height=0.5mm, Lead Free=LeadFree, Length=2mm, Manufacturer URL=http://www.yageo.com/, Military Standard=Not, Number of Pins=2, Package Reference=0805, Packaging=TapeandReel, Radiation Hardening=No, REACH SVHC=Unknown, RoHSCompliant=true, Termination=SMD/SMT, Voltage Rating (DC)=150V, Width=1.25mm
R13: library part CMP-2100-03673-1, "Chip Resistor, 0 Ohm, Jumper, +/- 5%, 0.125 W, -55 to 155 degC, 0805 (2012 Metric), RoHS, Tape and Reel", Case Code (Imperial)=0805, Case Code (Metric)=2012, Manufacturer=Yageo, Max Operating Temperature=155degC, Min Operating Temperature=-55degC, Package Description="2-Pin Surface Mounted Device, Body 2 x 1.25 mm", Power Rating=125mW, Resistance=100kOhm, Temperature Coefficient=200ppm/degreesC, Tolerance=5%, Voltage Rating=150V, Case/Package=0805, Composition=ThickFilm, Contact Plating=Tin, Datasheet URL=http://www.yageo.com/NewPortal/yageodocoutput?fileName=/pdf/R-Chip/PYu-RC_Group_51_RoHS_L_5.pdf, Datasheet Version="Rev. 5, 10/2016", Depth=1.25mm, Height=0.5mm, Lead Free=LeadFree, Length=2mm, Manufacturer URL=http://www.yageo.com/, Military Standard=Not, Number of Pins=2, Package Reference=0805, Packaging=TapeandReel, Radiation Hardening=No, REACH SVHC=Unknown, RoHSCompliant=true, Termination=SMD/SMT, Voltage Rating (DC)=150V, Width=1.25mm
U1 U2: library part CMP-04918-000232-1, "65V 2.5A SYNCHRONOUS BUCK CONVER", RoHS Compliant=Yes
?: library part CMP-12749-000001-1, "IC CUR SENSE MONITOR 4-TDFN", Input Current=100nA, Max Operating Temperature=85°C, Max Supply Voltage=20V, Min Operating Temperature=-40°C, Min Supply Voltage=2.5V, Operating Supply Current=3.5uA, Package Quantity=3000, Quiescent Current=3.5A, Accuracy=3%, Bandwidth=1MHz, Gain=50dB, Lead Free="Lead Free", Mount="Surface Mount", Number of Pins=4, Packaging="Tape and Reel", Radiation Hardening=No, REACH SVHC="No SVHC", Weight=0.001764oz

## Nets (pads, with @x,y where several pads share a name; then routed paths per layer and width w, separated by ;. In a path a pad name is that pad's centre, name@x,y a point inside that pad or via, vN(x,y) a via of type N, cw(c..) or ccw(c..) an arc to the next point about the centre after c; other vN are vias at no path point)
+5: 5v.1 C7.1 L1.2 R11.2 R13.2 | length 1769.1
  Top Layer w10: L1.2 3430,1418.74 R13.2 3453.62,1395.12 3476.54,1395.12 3580,1291.66 C7.1 3756.38,1219.06 3775,1237.68 R11.2 3793.62,1221.38 3793.62,1198.46 3864.64,1127.44 4500.54,1127.44 4603.1,1230 5v.1
+8.4: 8.4v.1 C8.1 L?.2 R9.2 R12.2 | length 1504.7
  Top Layer w10: L?.2 R9.2 3598.62,1676.38 3631.65,1676.38 3783.03,1525 C8.1 3786.97,1525 3821.97,1490 R12.2 3973.62,1508.62 3973.62,1531.54 4079.64,1637.56 4434.17,1637.56 4446.73,1625 8.4v.1
+12: D9.1 J2.1 Q?.2 | length 760.9
  Top Layer w10: J2.1 1391.52,1510 1393.92,1507.6 1547.6,1507.6 Q?.2 1600,1354.49 1496.97,1251.46 D9.1
GND: 5v.2 8.4v.2 "5v chck.2" ?.2 ?.5 C1.2 C3.1 C4.1 C7.2 C8.2 D8.2 D9.2 DS2.2 J2.2 Q4.1 R1.1 R4.1 R6.1 R7.1 R8.1 R10.1 U1.1 U1.9 U2.1 U2.9 | length 10024.6
  Top Layer w10: J2.2 1416.46,1058.54 D9.2 1646.5,1058.54 1667.13,1037.91 R1.1 1818.27,1037.91 D8.2 1973.27,1036.18 R4.1 1989.29,1052.2 ?.2 2087.6,1053.27 2109.25,1053.27 2120,1064.02 ?.5 ; R6.1 2321.7,1255 2240.21,1173.5 2223.84,1173.5 2182.42,1132.09 2169.81,1132.09 2128.62,1090.9 2128.62,1073.62 ?.5 ; Q4.1 2710.51,1565 2826.26,1680.75 2826.26,1741.49 2942.02,1857.25 3037.5,1857.25 3053.46,1841.29 U2.9@3053.46,1773.58 ; U2.1 3026.21,1880 3045.19,1861.02 3050.02,1861.02 3084.88,1826.16 U2.9 U2.9@3053.46,1773.58 ; C4.1 3040.47,1613.03 C4.1@3044.88,1608.62 ; R8.1 3574.37,1165.63 C7.2 3581.97,1160 3609.96,1188 3775.8,1188 3856.35,1107.44 4861.13,1107.44 4923.74,1170.05 4923.74,1289.95 4914.95,1298.74 4431.79,1298.74 4340.49,1207.44 ; 4315,1170 4342.32,1197.32 4342.32,1205.61 4340.49,1207.44 ; 5v.2 5102.5,1232.5 5102.5,1622.5 8.4v.2 5031.26,1556.26 4655.45,1556.26 4616.71,1595 DS2.2 4065.36,1595 3995.12,1524.76 3995.12,1456.74 3984.84,1446.46 3925.16,1446.46 3905.68,1465.94 C8.2 3774.25,1476.69 3672.73,1476.69 3657.49,1461.46 3581.25,1461.46 3560.75,1481.96 3560.75,1491.34 3559.25,1492.83 3559.25,1501.46 R10.1@3540.63,1520.08 ; ?.5 2128.62,1056.38 2128.62,1039.1 2137.41,1030.31 2246.66,1030.31 2254.26,1037.91 R7.1 2560.59,1037.91 2573.03,1025.47 C1.2 2747.91,1025.47 2880.47,1158.03 C3.1 2880.47,1161.97 3044.88,1326.38 U1.9 U1.9@3044.88,1456.16 ; U1.9@3044.88,1456.16 C4.1@3044.88,1608.62 ; U1.9@3044.88,1456.16 2998.29,1502.75 2957.01,1502.75 U1.1 2937.01,1510 2929.76,1517.25 2929.76,1595.01 3053.46,1718.71 U2.9@3053.46,1773.58 ; C4.1@3044.88,1608.62 3078.09,1575.41 3495.14,1575.41 3540.63,1529.92 R10.1 R10.1@3540.63,1520.08 ; R10.1@3540.63,1520.08 3540.63,1481.46 3603.98,1418.11 3670.27,1418.11 3813.62,1274.76 3813.62,1206.74 3823.9,1196.46 4076.7,1196.46 4087.69,1207.44 4340.49,1207.44
Net_1: ?.1 R6.2 R7.2 | length 778.1
  Top Layer w10: ?.1 2087.36,1077.8 2089.25,1079.69 2089.25,1087.95 2153.39,1152.09 2174.14,1152.09 2215.56,1193.5 2231.92,1193.5 2280,1241.58 2280,1253.42 2328.08,1301.5 2387.75,1301.5 2396.54,1292.71 2396.54,1217.29 2371,1191.76 2363.18,1191.76 2337.65,1166.23 2337.65,1157.94 2343.5,1152.09 2397.87,1152.09 2453.46,1207.68 2453.46,1236.38 R6.2
Net_3: ?.3 Q4.2 | length 773.4
  Top Layer w10: ?.3 2240.26,1052.2 2275.29,1087.23 2401.47,1087.23 2407.71,1093.46 2435.99,1093.46 2456.5,1113.97 2456.5,1142.25 2502.75,1188.5 2510.21,1188.5 2530.71,1209.01 2530.71,1300.99 2523.59,1308.11 2523.59,1330.48 Q4.2
Net_4: ?.4 Q3.3 R5.2 | length 1692.9
  Top Layer w10: R5.2 2087.91,1247.87 2106.54,1266.5 2152.25,1266.5 2172.25,1286.5 ; ?.4 2156.42,1077.8 2192.09,1113.46 2427.71,1113.46 2436.5,1122.25 2436.5,1150.54 2494.46,1208.5 2501.92,1208.5 2510.71,1217.29 2510.71,1292.71 2501.92,1301.5 2416.03,1301.5 2396.03,1321.5 2301.64,1321.5 2266.64,1286.5 2172.25,1286.5 ; Q3.3 2522.4,1712.6 2522.4,1521.39 2394.96,1393.94 2279.7,1393.94 2172.25,1286.5
NetC1_1: C1.1 C2.1 Q4.3 U1.2 U1.3 U2.2 U2.3 | length 1290.7
  Top Layer w10: C1.1 C2.1@2703.98,1084.53 ; C2.1@2721.97,1070.47 C2.1 2718.03,1070.47 C2.1@2703.98,1084.53 ; U2.2 U2.3 2953.3,1780 2886.06,1712.75 2886.06,1487.25 2913.3,1460 2943.06,1460 2949.76,1453.31 U1.3 2913.3,1410 2868.3,1365 Q4.3 2658.11,1130.39 C2.1@2703.98,1084.53
NetC3_2: C3.2 U1.6 | length 1068
  Top Layer w10: C3.2 2939.53,1161.97 2950.28,1172.72 2952.72,1172.72 2985.75,1205.75 3465.74,1205.75 3478.54,1218.55 3478.54,1364.84 3468.26,1375.12 3211.34,1375.12 3176.46,1410 U1.6
NetC4_2: C4.2 U2.6 | length 1326.4
  Top Layer w10: C4.2 3303.17,1615 3322.76,1595.41 3527.47,1595.41 3545.24,1577.64 3561.37,1577.64 3580.75,1558.26 3580.75,1490.24 3589.53,1481.46 3649.21,1481.46 3657.99,1490.24 3657.99,1611.65 3613.26,1656.38 3340.08,1656.38 3216.46,1780 U2.6
NetC5_1: C5.1 U2.7 | length 261.2
  Top Layer w10: U2.7 3220.38,1830 3235.38,1815 C5.1
NetC5_2: C5.2 L?.1 U2.8 | length 483.3
  Top Layer w10: U2.8 3424.68,1880 3467.72,1836.96 3467.72,1786.69 C5.2@3446.02,1765 ; C5.2 3436.97,1755.94 C5.2@3446.02,1765 ; L?.1 C5.2@3446.02,1765
NetC6_1: C6.1 U1.7 | length 121.7
  Top Layer w10: U1.7 3255.94,1460 C6.1
NetC6_2: C6.2 L1.1 U1.8 | length 244.2
  Top Layer w10: U1.8 3255,1510 C6.2 3270,1525 L1.1
NetD1_1: D1.1 Q2.2 Q3.2 Q?.3 R2.2 | length 1428.3
  Top Layer w10: Q?.3 1500,1622.87 1587.36,1710.24 D1.1 1587.36,1739.76 1606.97,1759.37 1676.39,1759.37 1696.39,1779.37 1792.76,1779.37 1872.13,1700 R2.2 2136.02,1700 2157.4,1678.61 2157.4,1587.4 Q2.2 2285,1535 2415,1665 Q3.2
NetD1_2: D1.2 Q?.1 R1.2 | length 601.5
  Top Layer w10: R1.2 1681.38,1152.09 1700,1170.71 Q?.1 1700,1675.24 1735,1710.24 D1.2
NetD8_1: D8.1 R2.1 R3.2 | length 426.9
  Top Layer w10: D8.1 1820,1346.3 1865.83,1392.13 R3.2 1865.83,1571.65 R2.1
NetDS2_1: DS2.1 R12.1 | length 318.3
  Top Layer w10: R12.1 4345,1490 DS2.1
NetDS?_1: "5v chck.1" R11.1 | length 476.6
  Top Layer w10: R11.1 3853.74,1244.92 3878.82,1270 4315,1270
NetQ2_1: Q2.1 R3.1 | length 286.8
  Top Layer w10: R3.1 1980,1510 Q2.1
NetQ2_3: Q2.3 Q3.1 R4.2 | length 755.6
  Top Layer w10: R4.2 1975,1305 Q2.3 2285,1435 2382.6,1532.6 2437.6,1532.6 Q3.1
NetR8_2: R8.2 R13.1 U1.5 | length 397.6
  Top Layer w10: U1.5 3176.46,1360 3201.46,1335 R13.1 3435,1248.39 R8.2
NetR9_1: R9.1 R10.2 U2.5 | length 557.6
  Top Layer w10: U2.5 3216.46,1730 3330.2,1616.26 R9.1 3584.92,1616.26 3619.37,1581.81 R10.2
pads on no net: C2.2 R5.1 U1.4 U2.4

## Other copper
Top Layer:
  text "output" at 4610,1859.99 h60
  text "gnd" at 5040,1839.99 h60

## Silkscreen, mask and mechanical layers (free items; w line width, h text height)
Top Overlay:
  text "8.4v check" at 4220,1735 h30

## Text inside footprints (layer, text, board x,y; h text height)
"5v chck": Top Overlay "+" at 4265,1395 h59.06 r270
DS2: Top Overlay "+" at 4385,1370 h59.06 r90